# Altium PCB PCB.PcbDoc
Units mil, origin at the board's own origin, x right, y up, seen from the top; angles counter-clockwise.
Board outline 3410 x 3580 mil, 2 copper layers (Top Layer, Bottom Layer); 56 components, 51 nets, 246 pads, 33 vias.
Unrouted connection lines stored in the file: 2.
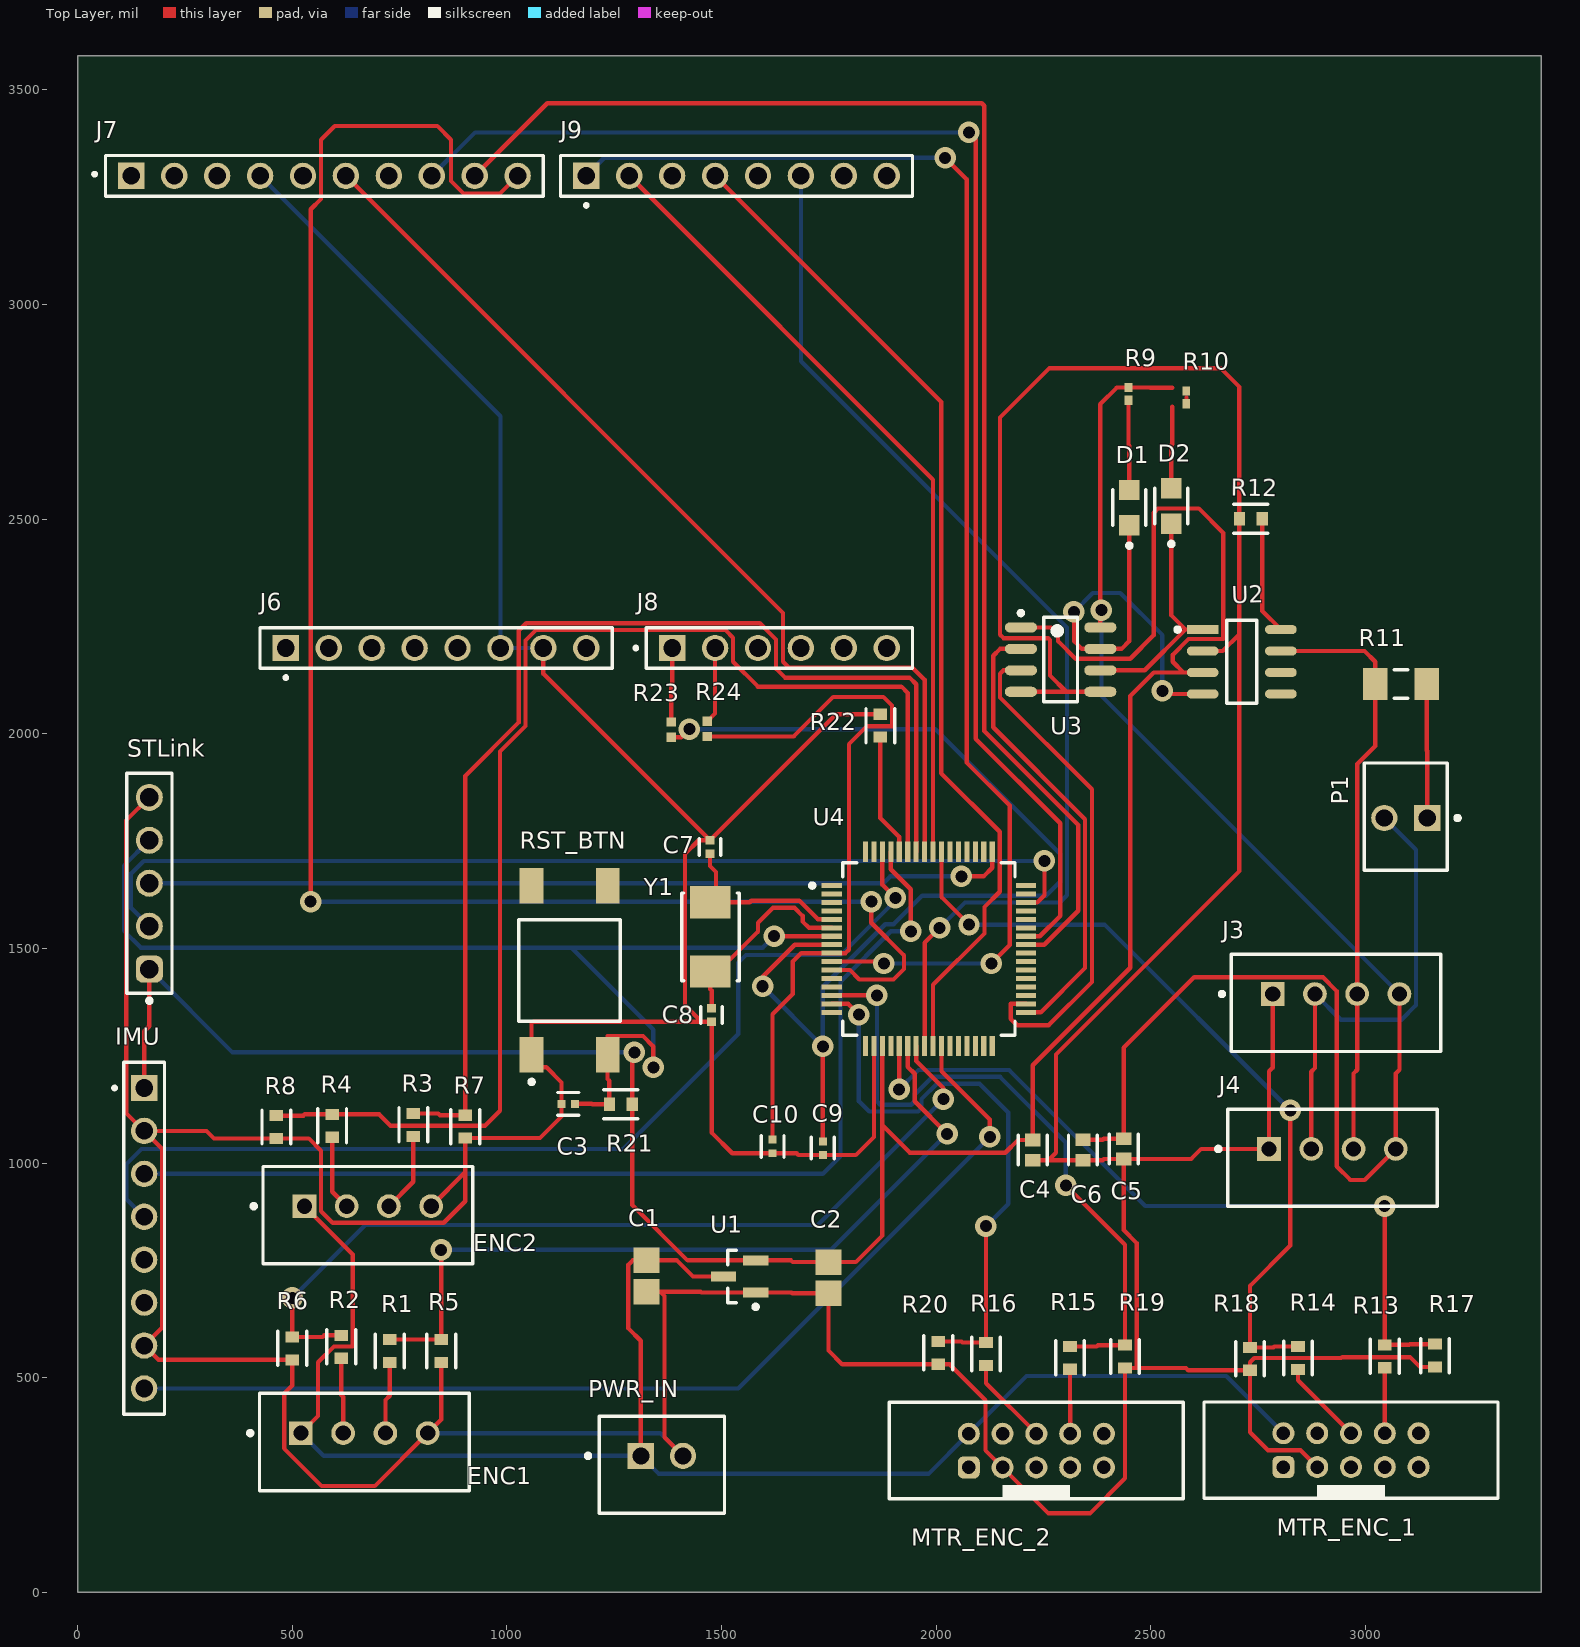
[diagram p0: Top Layer view]
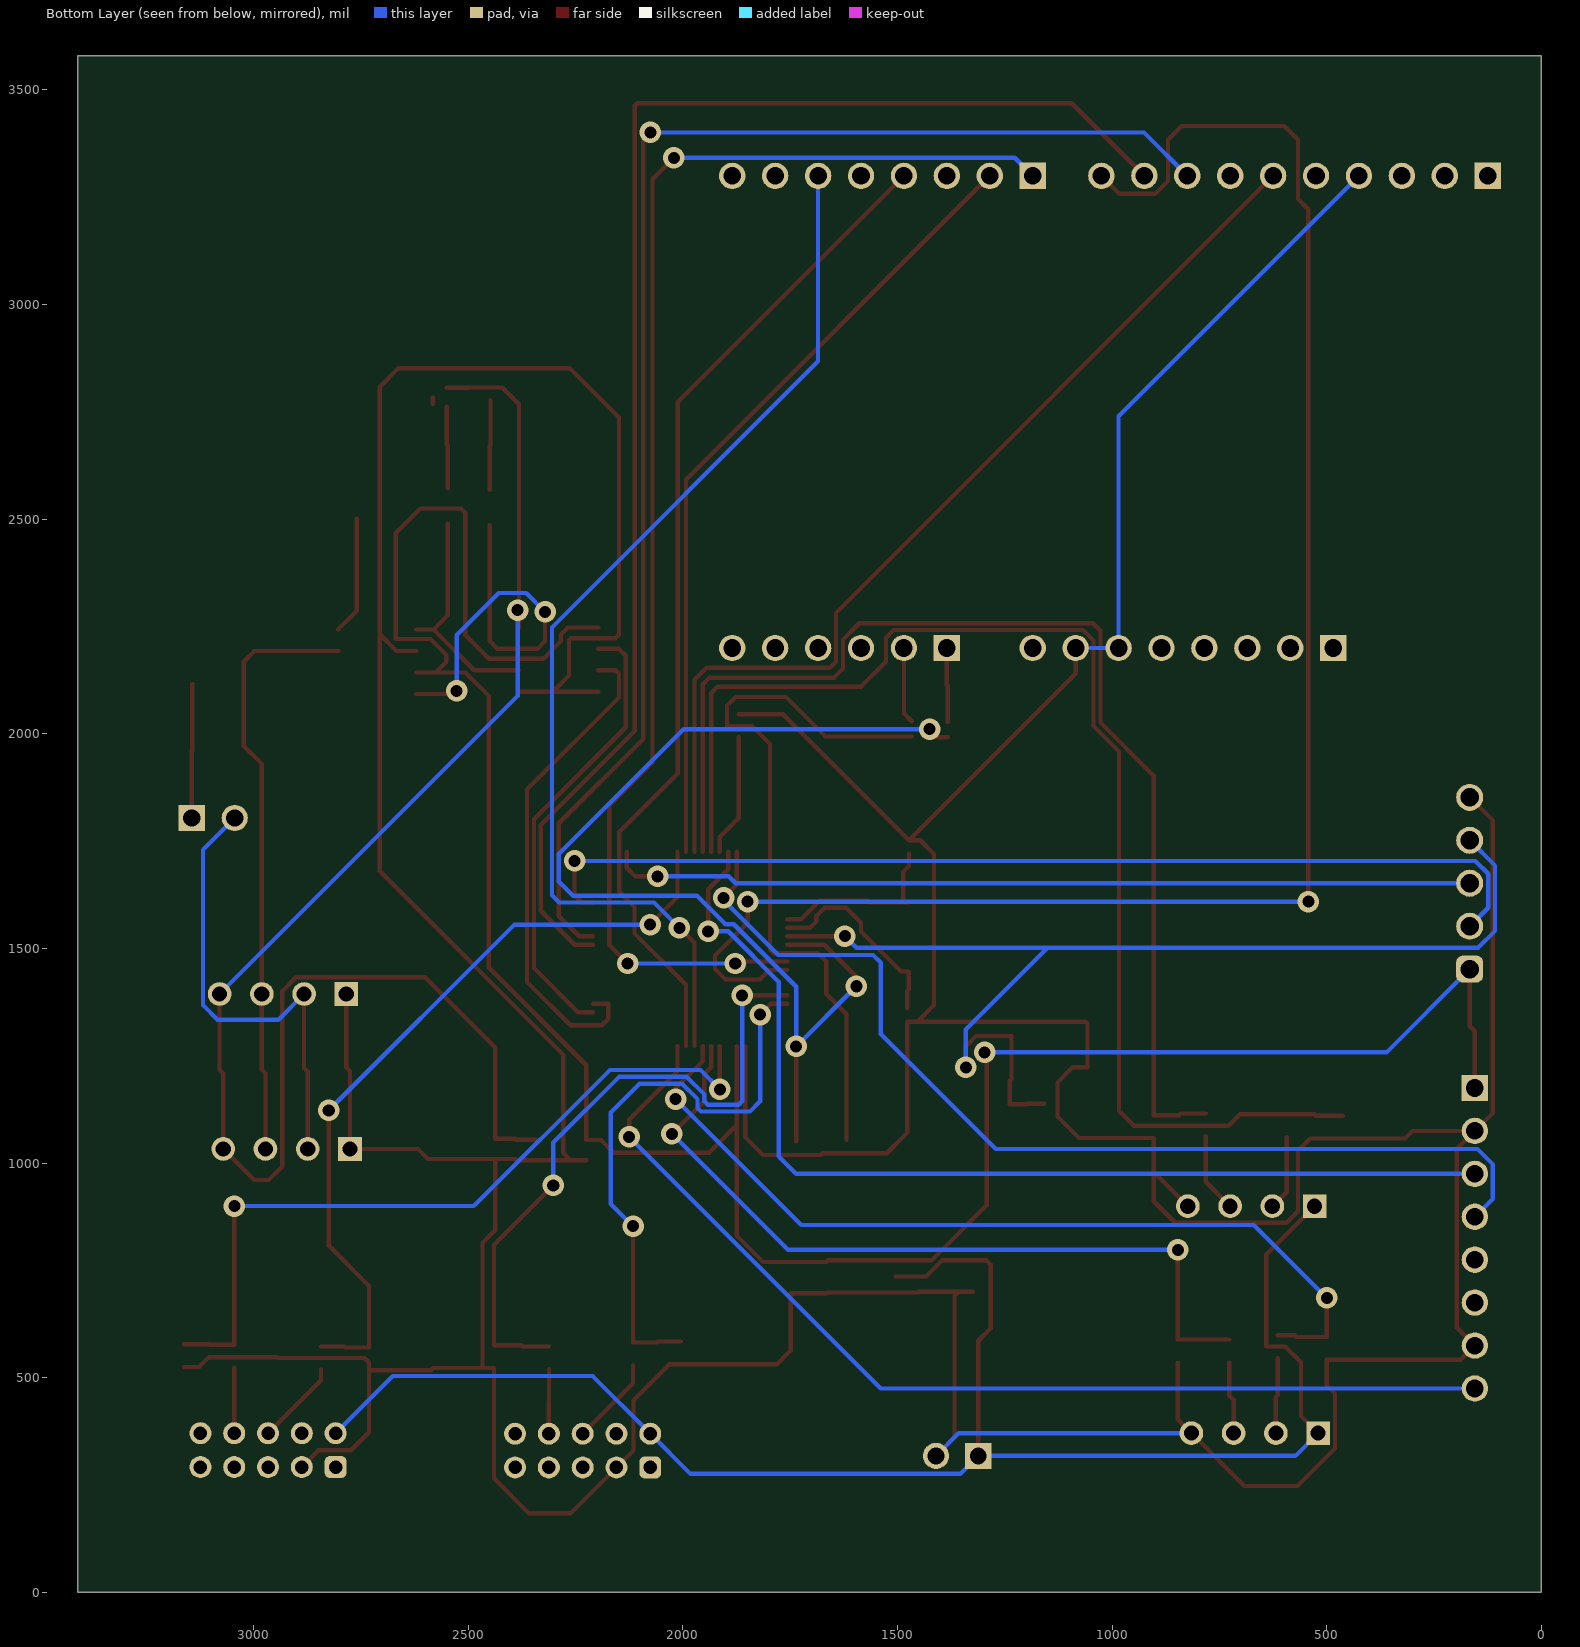
[diagram p1: Bottom Layer view, seen from below]
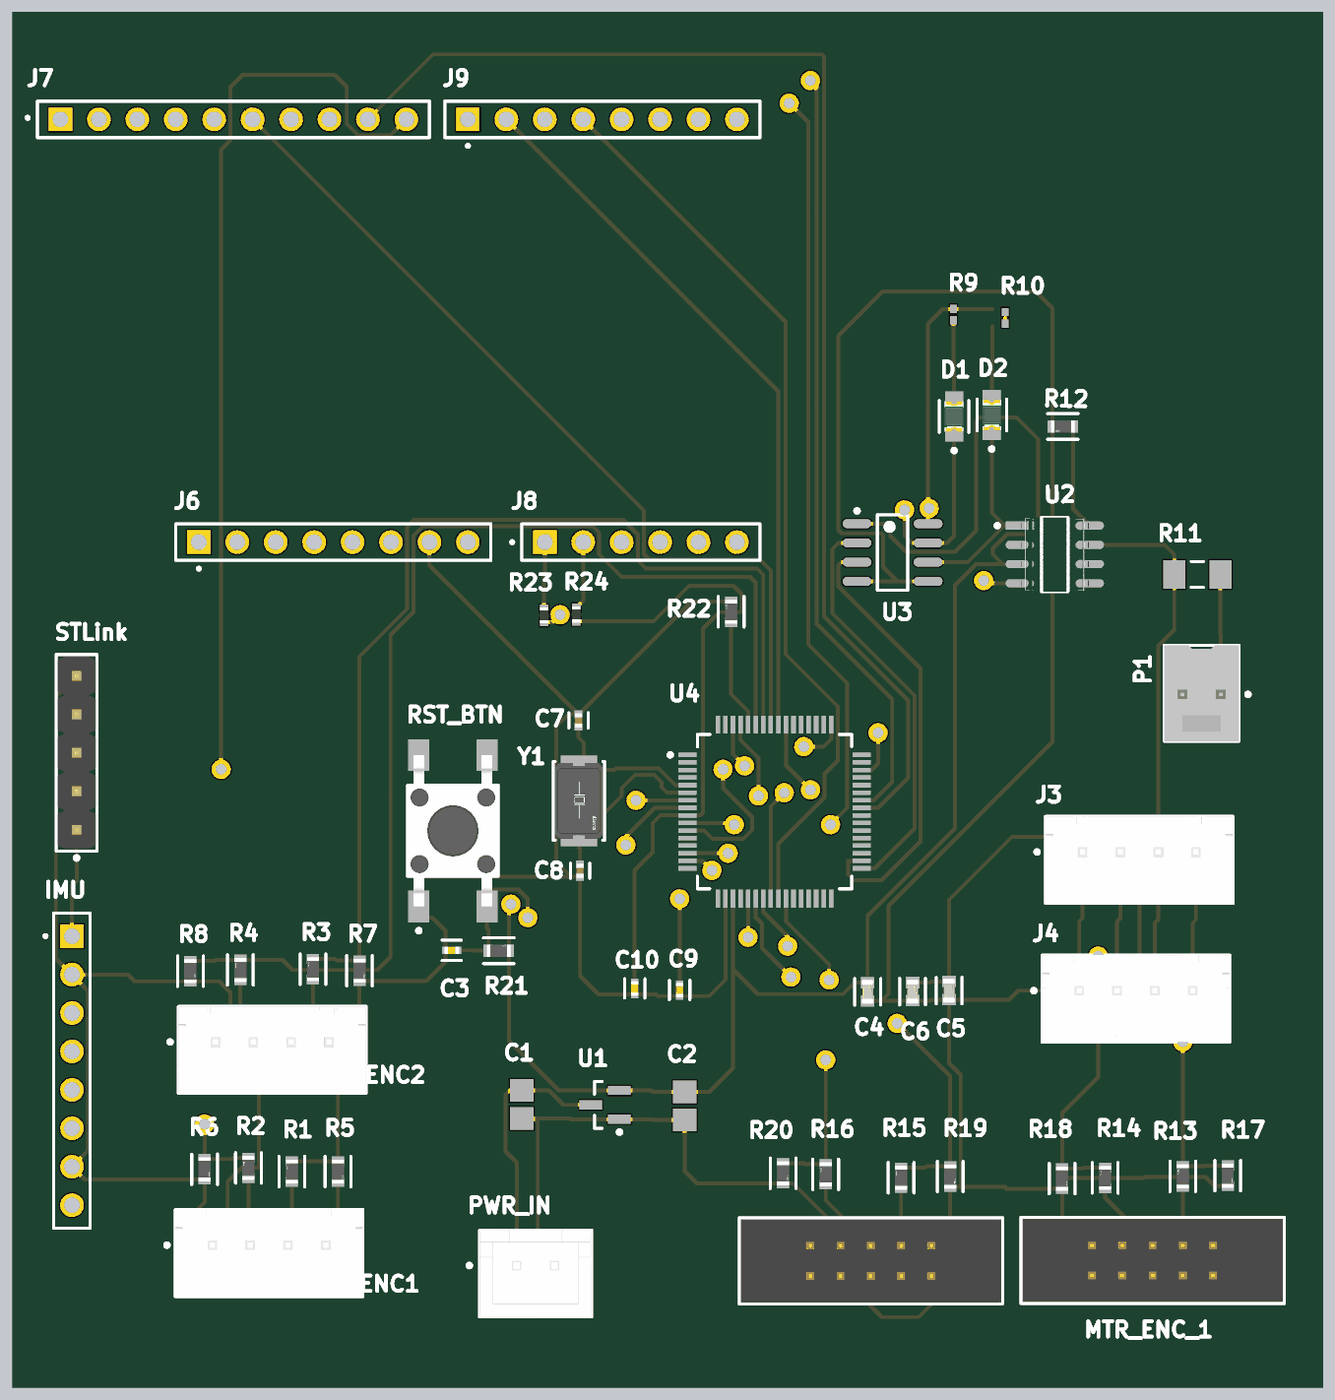
[diagram p2: 3D render of the assembled board from above, using the file's embedded part models]

## Layer stack, top to bottom
Top Solder: solder mask 0.4, Solder Resist, Dk 3.5
Top Layer: signal copper 1.4
Dielectric 1: dielectric 12.6, FR-4, Dk 4.8
Bottom Layer: signal copper 1.4
Bottom Solder: solder mask 0.4, Solder Resist, Dk 3.5

## Board outline
0,0 3410,0 3410,3580 0,3580

## Design rules (kind name [scope] priority, off if disabled: settings)
Clearance [All] p1: gap=6 ignorepadtopadclearanceinfootprint=FALSE
PolygonConnect [All] p1: connectstyle=Relief reliefconductorwidth=10 reliefentries=4 polygonreliefangle="90 Angle" airgapwidth=10
RoutingVias [All] p1: holewidth=28 width=50 viastyle="Through Hole" minholewidth=28 minwidth=50 maxholewidth=28 maxwidth=50
SolderMaskExpansion [All] p1: expansion=4 istentingtop=FALSE
SupplyNets "Schematic Supply Nets_7" [InNet('OSC2')] p1: voltage=0.000
SupplyNets "Schematic Supply Nets_6" [InNet('GND')] p2: voltage=0.000
SupplyNets "Schematic Supply Nets_5" [InNet('CAN_TX')] p3: voltage=0.000
SupplyNets "Schematic Supply Nets_4" [InNet('VCC-5V')] p4: voltage=0.000
SupplyNets "Schematic Supply Nets_3" [InNet('OSC1')] p5: voltage=0.000
SupplyNets "Schematic Supply Nets_2" [InNet('CAN-3V3')] p6: voltage=0.000
SupplyNets "Schematic Supply Nets_1" [InNet('VCC-3V3')] p7: voltage=0.000
SupplyNets "Schematic Supply Nets" [InNet('CAN_RX')] p8: voltage=0.000
Width [All] p1: maxlimit=10 minlimit=10 preferedwidth=10
30 further rules are at their usual default settings.

## Classes and differential pairs
component class VoltageRegulator_3v3: C1 C2 U1
component class STM32: C3 R21 R22 RST_BTN U4
component class STLink: STLink
component class Power: PWR_IN
component class Oscilator: C7 C8 Y1
component class OdomEncoders: ENC1 ENC2 R1 R2 R3 R4 R5 R6 R7 R8
component class MotorShield: C9 C10 J6 J7 J8 J9 R23 R24
component class MotorEncoders: MTR_ENC_1 MTR_ENC_2 R13 R14 R15 R16 R17 R18 R19 R20
component class IMU: IMU
component class Communication: C4 C5 C6 D1 D2 J3 J4 P1 R9 R10 R11 R12 U2 U3

## Components (designator, comment, footprint, x,y, rotation, side; value= is the part's Value field where it differs from the comment)
C1 "VJ0805Y105KXJTW1BC" CAPC2013X145X48ML20T23 1325,737 r90 top
C2 "VJ0805Y105KXJTW1BC" CAPC2013X145X48ML20T23 1749,733 r90 top
C3 "100nF" FP-0402B104K160CT-IPC_C 1143,1138 r180 top
C4 "C0603C104K8RACTU" FP-C0603C-CF-MFG 2225,1030.38 r270 top value="0.10 μF"
C5 "C0603C104K8RACTU" FP-C0603C-CF-MFG 2437,1033.24 r270 top value="0.10 μF"
C6 "C0603C104K8RACTU" FP-C0603C-CF-MFG 2342,1030.62 r270 top value="0.10 μF"
C7 "C0402C220J4GACAUTO" FP-C0402-BB-MFG 1473,1736.25 r90 top value="22 pF"
C8 "C0402C220J4GACAUTO" FP-C0402-BB-MFG 1477,1345.25 r270 top value="22 pF"
C9 "100nF" FP-0402B104K160CT-IPC_C 1736,1034.87 r90 top
C10 "100nF" FP-0402B104K160CT-IPC_C 1619,1038.87 r270 top
D1 "APHCM2012CGCK-F01" FP-APHCM2012CGCK-F01-MFG 2450,2527 r90 top
D2 "APHCM2012CGCK-F01" FP-APHCM2012CGCK-F01-MFG 2548,2531 r90 top
ENC1 "B4B-XH-A(LF)(SN)" FP-B4B-XH-A_LF_SN-MFG 667.79,350.33 r180 top
ENC2 "B4B-XH-A(LF)(SN)" FP-B4B-XH-A_LF_SN-MFG 676,879 r180 top
IMU "SSW-108-XX-X-S" SAMTEC_SSW-108-XX-X-S 155,1175 r270 top
J3 "B4B-XH-A(LF)(SN)" FP-B4B-XH-A_LF_SN-MFG 2931.64,1373.33 r180 top
J4 "B4B-XH-A(LF)(SN)" FP-B4B-XH-A_LF_SN-MFG 2923.21,1012.33 r180 top
J6 "SSW-108-XX-X-S" SAMTEC_SSW-108-XX-X-S 485,2200 r0 top locked
J7 "SSW-110-01-XXX-S" SAMTEC_SSW-110-01-XXX-S 125,3300 r0 top
J8 "SSW-106-01-X-S" SAMTEC_SSW-106-01-X-S 1385,2200 r0 top locked
J9 "SSW-108-XX-X-S" SAMTEC_SSW-108-XX-X-S 1185,3300 r0 top
MTR_ENC_1 "62501021621" 62501021621 2966.48,331.37 r0 top
MTR_ENC_2 "62501021621" 62501021621 2233.48,330.37 r0 top
P1 "22-23-2021" MOLX-22-23-2021_V 3094,1804 r180 top
PWR_IN "B2B-XH-A(LF)(SN)" FP-B2B-XH-A_LF_SN-MFG 1361.21,297.33 r0 top
R1 "10K" FP-RC0603-0_55-IPC_C 727,562.36 r90 top
R2 "10K" FP-RC0603-0_55-IPC_C 614,572 r90 top
R3 "10K" FP-RC0603-0_55-IPC_C 782,1089 r90 top
R4 "10K" FP-RC0603-0_55-IPC_C 593,1087 r90 top
R5 "20K" FP-RC0603-0_55-IPC_C 847,562.36 r270 top
R6 "20K" FP-RC0603-0_55-IPC_C 500,568.36 r270 top
R7 "20K" FP-RC0603-0_55-IPC_C 903,1085 r270 top
R8 "20K" FP-RC0603-0_55-IPC_C 463,1084 r270 top
R9 "CRCW02011K00JNED" RESC0603X28X15ML05T05 2448,2792 r90 top
R10 "CRCW02011K00JNED" RESC0603X28X15ML05T05 2583,2783.76 r90 top
R11 "RG3216P-1200-B-T5" RESC3216X50X50ML20T20 3082.96,2116 r0 top
R12 "10K" FP-RC0603-0_55-IPC_C 2733,2501 r180 top
R13 "10K" FP-RC0603-0_55-IPC_C 3045,550 r90 top
R14 "10K" FP-RC0603-0_55-IPC_C 2843,546 r90 top
R15 "10K" FP-RC0603-0_55-IPC_C 2312,546.36 r90 top
R16 "10K" FP-RC0603-0_55-IPC_C 2116,555.36 r90 top
R17 "20K" FP-RC0603-0_55-IPC_C 3162,551.64 r270 top
R18 "20K" FP-RC0603-0_55-IPC_C 2731,544 r270 top
R19 "20K" FP-RC0603-0_55-IPC_C 2440,549.36 r270 top
R20 "20K" FP-RC0603-0_55-IPC_C 2005,558 r270 top
R21 "10k" FP-RC0603-0_55-IPC_C 1265.36,1137 r0 top
R22 "10k" FP-RC0603-0_55-IPC_C 1870,2019 r90 top
R23 "1k" RESC1005X40X25NL05T05 1383,2009.72 r90 top
R24 "1k" RESC1005X40X25NL05T05 1467,2011.72 r90 top
RST_BTN "1301.9316.24" FP-1301_9316_24-MFG 1146,1449 r90 top
STLink "61300511121" 61300511121 167,1652 r90 top
U1 "MCP1700T-3302E/TT" SOT-23-TT3_N 1542,736 r180 top
U2 "SN65HVD230QDR" FP-D0008A-IPC_C 2712,2168 r0 top
U3 "ADUM1201BRZ-RL7" ADI-R-8_L 2290,2173 r0 top
U4 "STM32F446RET6" FP-LQFP64-5W-MFG 1983,1499 r0 top
Y1 "ABM3-8.000MHZ-D2Y-T" FP-ABM3-MFG 1474,1527 r270 top

## Footprints (in the part's own frame and the unit in brackets; to place one, negate y for a bottom-side part, rotate by r counter-clockwise, add the part's x,y. Pads: shape width x height; smd on the part's side, far side on the other; paste and mask are expansions set on the pad)
61300511121 [mm] "Pin Header, pitch 2.54 mm, THT, Vertical, single row, 5p"
  rrect50% 1.6x1.6 hole 1.1: 1(-5.08,0)
  round 1.6 hole 1.1: 2(-2.54,0) 3(0,0) 4(2.54,0) 5(5.08,0)
  silkscreen extent -7.07,-1.34 6.5,1.34, body extent -6.35,-1.27 6.35,1.27, height 8.57
62501021621 [mm] "2.00mm Male Box Header, 10p"
  rrect50% 1.3x1.3 hole 0.8: 1(-4,-1)
  round 1.3 hole 0.8: 2(-4,1) 3(-2,-1) 4(-2,1) 5(0,-1) 6(0,1) 7(2,-1) 8(2,1) 9(4,-1) 10(4,1)
  silkscreen extent -8.7,-2.85 8.7,2.85, body extent -8.6,-2.75 8.6,2.75, height 5.65
ADI-R-8_L [mm] "SOIC, 8-Leads, Body 4.9x3.9mm, Pitch 1.27mm, IPC High Density"
  oval 1.9x0.6 smd: 1(-2.35,1.905) 2(-2.35,0.635) 3(-2.35,-0.635) 4(-2.35,-1.905) 5(2.35,-1.905) 6(2.35,-0.635) 7(2.35,0.635) 8(2.35,1.905)
  silkscreen extent -2.47,-2.5 1,2.88, body extent -2,-2.5 2,2.5, height 1.75
CAPC2013X145X48ML20T23 [mm] "Chip Capacitor, 2-Leads, Body 2.00x1.25mm, IPC Low Density"
  rect 1.5x1.55 smd: 1(-0.925,0) 2(0.925,0)
  body extent -1.1,-0.72 1.1,0.72, height 1.45
FP-0402B104K160CT-IPC_C [mil]
  rect 18.36x18.6 smd paste+0 mask+0: 1(-15.87,0) 2(15.87,0)
  silkscreen extent -25,-27 25,27, body extent -29,-15 29,15, height 10
FP-1301_9316_24-MFG [mm]
  rect 2.1x1.4 smd paste+0 mask+0: 1(-5,2.25) 2(5,2.25) 3(-5,-2.25) 4(5,-2.25)
  silkscreen extent -6.72,-3 3,3, body extent -6.15,-3.1 6.15,3.1, height 0.25
FP-ABM3-MFG [mm]
  rect 1.9x2.4 smd paste+0 mask+0: 1(-2.05,0) 2(2.05,0)
  silkscreen extent -2.6,-1.7 2.6,1.7, body extent -3.1,-1.8 3.1,1.8, height 0.25
FP-APHCM2012CGCK-F01-MFG [mm]
  rect 1.2x1.2 smd paste+0 mask+0: 1(-1.05,0) 2(1.05,0)
  silkscreen extent -2.37,-0.98 1.05,0.98, body extent -1.75,-0.77 1.75,0.77, height 0.25
FP-B2B-XH-A_LF_SN-MFG [mm]
  rect 1.55x1.55 hole 1 paste-2539.97 mask+0: 1(-1.25,0.525)
  round 1.55 hole 1 paste-2539.97 mask+0: 2(1.25,0.525)
  silkscreen extent -4.5,-2.87 3.7,2.88, body extent -3.8,-2.98 3.8,2.98, height 0.25
FP-B4B-XH-A_LF_SN-MFG [mm]
  rect 1.4x1.4 hole 0.9 paste-2539.97 mask+0: 1(3.75,-0.525)
  round 1.4 hole 0.9 paste-2539.97 mask+0: 2(1.25,-0.525) 3(-1.25,-0.525) 4(-3.75,-0.525)
  silkscreen extent -6.2,-2.88 6.87,2.87, body extent -6.3,-2.98 6.3,2.98, height 0.25
FP-C0402-BB-MFG [mm]
  rect 0.52x0.52 smd paste+0 mask+0: 1(-0.4,0) 2(0.4,0)
  silkscreen extent -0.5,-0.64 0.5,0.64, body extent -0.8,-0.4 0.8,0.4, height 0.25
FP-C0603C-CF-MFG [mm]
  rect 0.75x0.9 smd paste+0 mask+0: 1(-0.6,0) 2(0.6,0)
  silkscreen extent -0.87,-0.85 0.88,0.85, body extent -1.2,-0.6 1.2,0.6, height 0.25
FP-D0008A-IPC_C [mil]
  rect 73.59x21.34 smd paste+0 mask+0: 1(-91.09,75)
  rrect100% 73.59x21.34 smd paste+0 mask+0: 2(-91.09,25) 3(-91.09,-25) 4(-91.09,-75) 5(91.09,-75) 6(91.09,-25) 7(91.09,25) 8(91.09,75)
  silkscreen extent -154,-97 35,97, body extent -132,-100 132,100, height 10
FP-LQFP64-5W-MFG [mm]
  rect 1.2x0.3 smd paste+0 mask+0: 1(-5.75,3.75) 2(-5.75,3.25) 3(-5.75,2.75) 4(-5.75,2.25) 5(-5.75,1.75) 6(-5.75,1.25) 7(-5.75,0.75) 8(-5.75,0.25) 9(-5.75,-0.25) 10(-5.75,-0.75) 11(-5.75,-1.25) 12(-5.75,-1.75) 13(-5.75,-2.25) 14(-5.75,-2.75) 15(-5.75,-3.25) 16(-5.75,-3.75) 33(5.75,-3.75) 34(5.75,-3.25) 35(5.75,-2.75) 36(5.75,-2.25) 37(5.75,-1.75) 38(5.75,-1.25) 39(5.75,-0.75) 40(5.75,-0.25) 41(5.75,0.25) 42(5.75,0.75) 43(5.75,1.25) 44(5.75,1.75) 45(5.75,2.25) 46(5.75,2.75) 47(5.75,3.25) 48(5.75,3.75)
  rect 0.3x1.2 smd paste+0 mask+0: 17(-3.75,-5.75) 18(-3.25,-5.75) 19(-2.75,-5.75) 20(-2.25,-5.75) 21(-1.75,-5.75) 22(-1.25,-5.75) 23(-0.75,-5.75) 24(-0.25,-5.75) 25(0.25,-5.75) 26(0.75,-5.75) 27(1.25,-5.75) 28(1.75,-5.75) 29(2.25,-5.75) 30(2.75,-5.75) 31(3.25,-5.75) 32(3.75,-5.75) 49(3.75,5.75) 50(3.25,5.75) 51(2.75,5.75) 52(2.25,5.75) 53(1.75,5.75) 54(1.25,5.75) 55(0.75,5.75) 56(0.25,5.75) 57(-0.25,5.75) 58(-0.75,5.75) 59(-1.25,5.75) 60(-1.75,5.75) 61(-2.25,5.75) 62(-2.75,5.75) 63(-3.25,5.75) 64(-3.75,5.75)
  silkscreen extent -7.02,-5.1 5.1,5.1
FP-RC0603-0_55-IPC_C [mil]
  rect 25.93x31.97 smd paste+0 mask+0: 1(-26.64,0) 2(26.64,0)
  silkscreen extent -40,-33 40,33, body extent -44,-22 44,22, height 10
MOLX-22-23-2021_V [mm] "THD, 2-Leads, Body 6.35x4.93mm, Pitch 2.54mm"
  rect 1.55x1.55 hole 1.02: 1(-1.27,0)
  round 1.55 hole 1.02: 2(1.27,0)
  silkscreen extent -3.19,-3.25 2.47,3.1, body extent -2.46,-3.25 2.46,3.1, height 10.66
RESC0603X28X15ML05T05 [mm] "Chip Resistor, 2-Leads, Body 0.60x0.30mm, IPC Low Density"
  rect 0.55x0.45 smd: 1(-0.375,0) 2(0.375,0)
  body extent -0.33,-0.17 0.33,0.18, height 0.28
RESC1005X40X25NL05T05 [mm] "Chip Resistor, 2-Leads, Body 1.05x0.55mm, IPC Medium Density"
  rect 0.55x0.55 smd: 1(-0.45,0) 2(0.45,0)
  body extent -0.53,-0.28 0.53,0.28, height 0.4
RESC3216X50X50ML20T20 [mm] "Chip Resistor, 2-Leads, Body 3.20x1.60mm, IPC Low Density"
  rect 1.45x1.9 smd: 1(-1.525,0) 2(1.525,0)
  silkscreen extent -0.4,-0.85 0.4,0.85, body extent -1.7,-0.9 1.7,0.9, height 0.5
SAMTEC_SSW-106-01-X-S [mm]
  rect 1.56x1.56 / inner round 1.56 / far side rect 1.56x1.56 hole 1.04: 01(0,0)
  round 1.56 hole 1.04: 02(2.54,0) 03(5.08,0) 04(7.62,0) 05(10.16,0) 06(12.7,0)
  silkscreen extent -2.25,-1.2 14.23,1.2
SAMTEC_SSW-108-XX-X-S [mm]
  rect 1.56x1.56 / inner round 1.56 / far side rect 1.56x1.56 hole 1.04: 01(0,0)
  round 1.56 hole 1.04: 02(2.54,0) 03(5.08,0) 04(7.62,0) 05(10.16,0) 06(12.7,0) 07(15.24,0) 08(17.78,0)
  silkscreen extent -1.53,-1.85 19.31,1.2
SAMTEC_SSW-110-01-XXX-S [mm]
  rect 1.56x1.56 / inner round 1.56 / far side rect 1.56x1.56 hole 1.04: 01(0,0)
  round 1.56 hole 1.04: 02(2.54,0) 03(5.08,0) 04(7.62,0) 05(10.16,0) 06(12.7,0) 07(15.24,0) 08(17.78,0) 09(20.32,0) 10(22.86,0)
  silkscreen extent -2.27,-1.2 24.39,1.2
SOT-23-TT3_N [mm] "SOT23, 3-Leads, Body 2.9x1.3mm, Pitch 0.95mm, Lead Span 2.4mm, IPC Medium Density"
  rect 1.5x0.6 smd: 1(-0.95,0.95) 2(-0.95,-0.95) 3(0.95,0)
  silkscreen extent -1.07,-1.55 0.7,1.92, body extent -0.7,-1.52 0.7,1.53, height 1.12

## Part data
C1 C2: library part CMP-2007-03175-1, Manufacturer=Vitramon, Part Number=VJ0805Y105KXJTW1BC
C3 C9 C10: library part CMP-45632-000002-1, "CAP CER 0.1UF 16V X7R 0402", Case Code (Imperial)=0402, Case Code (Metric)=1005, Dielectric=X7R, Max Operating Temperature=125°C, Min Operating Temperature=-55°C, Tolerance=10%, Voltage Rating=16V, Capacitance=100nF, Case/Package=0402, Depth=0.5mm, Lead Free="Lead Free", Length=1mm, Packaging="Tape and Reel", Radiation Hardening=No, RoHS Compliant=Yes, Series=-, Voltage Rating (DC)=16V
C4 C5 C6: library part CMP-1035-02580-3, "CAP CER 0.1UF 10V X7R 0603", Capacitance="0.10 μF", Manufacturer=KEMET, Package=C0603C-CF, Temperature="-55°C to +125°C", Temperature Characteristic=X7R, Temperature Coefficient=30ppm/°C, Temperature Range High=+125°C, Temperature Range Low=-55°C, Tolerance=0.1, Voltage Rating="10 V", Automotive=Yes, Automotive Grade="Grade 1", Category=Cap, ComponentLink2Description=Datasheet, ComponentLink2URL=https://api.kemet.com/component-edge/download/datasheet/C0603C100J5GACAUTO.pdf, Device Class L1="Passive Components", Device Class L2=Capacitors, Device Class L3="Ceramic Capacitors", Digikey Description="CAP CER 0.1UF 10V X7R 0603", Height=0.87mm, Lead Free=Yes, Manufacturer Part Number=C0603C104K8RACTU, Material=Ceramic, Mouser Description="Multilayer Ceramic Capacitors MLCC - SMD/SMT 10volts 0.1uF X7R 10%", Octopart=https://octopart.com/c0603c104k8ractu-kemet-145075, RoHS=TRUE
C7 C8: library part CMP-03020-002269-1, "C0402 22 pF C0G 5.00% 16 V", Capacitance="22 pF", Manufacturer=Kemet, Package=C0402-BB, Temperature="-55°C to +125°C", Temperature Characteristic=C0G, Temperature Coefficient=15%, Temperature Range High=+125°C, Temperature Range Low=-55°C, Tolerance=0.05, Voltage Rating="16 V", Automotive=No, Category=Cap, ComponentLink2Description=Datasheet, ComponentLink2URL=https://content.kemet.com/datasheets/KEM_C1002_X7R_SMD.pdf, Device Class L1="Passive Components", Device Class L2=Capacitors, Device Class L3="Ceramic Capacitors", Height=0.55mm, Ipc Land Pattern Name=CAPC10050X50, Lead Free=Yes, Manufacturer Part Number=C0402C220J4GACAUTO, Material=Ceramic, Octopart=https://octopart.com/c0402c220j4gacauto-kemet-95437018, RoHS=TRUE
D1 D2: library part CMP-44529-000062-1, "LED GREEN CLEAR CHIP SMD", Case Code (Imperial)=0805, Case Code (Metric)=2012, Color=Green, Forward Current=20mA, Forward Voltage=2.1V, Lens Color=Clear, Max Operating Temperature=85°C, Min Operating Temperature=-40°C, Package Quantity=1, Case/Package=0805, Dominant Wavelength=570nm, Height=0.4mm, Illumination Color=Green, Lead Free="Lead Free", Length=2mm, Lens Style=Clear, Luminous Intensity=40mcd, Mount="Surface Mount", Number of LEDs=1, Number of Pins=2, Packaging="Tape and Reel", RoHS Compliant=Yes, Series=APHCM, Test Current=20mA, Viewing Angle=110°, Wavelength=570nm, Width=1.25mm
ENC1 ENC2 J3 J4: library part CMP-17439-000250-1, "CONN HEADER VERT 4POS 2.5MM", Color=Natural, Contact Resistance=20mR, Current Rating=3A, Flammability Rating="UL94 V-0", Housing Color=White, Insulation Resistance=1GR, Max Operating Temperature=85°C, Max Voltage Rating (AC)=250V, Min Operating Temperature=-25°C, Package Quantity=500, Connector Type=Header, Contact Finish - Mating=TIN, Contact Material=Brass, Contact Plating=Tin, Contact Shape=Square, Contact Type="Male Pin", Depth=5.75mm, Fastening Type=Detent, Gender=Male, Housing Material=Polyamide, Insulation Color=Natural, Insulation Material=Nylon, Lead Free="Lead Free", Lead Pitch=2.5mm, Length=12.4mm, Mated Stacking Heights=9.8mm, Material=Polyamide, Max Current Rating=3A, Max Voltage Rating (DC)=250V, Mount="Through Hole", Number of Contacts=4, Number of Positions=4, Number of Rows=1, Orientation=Straight, Packaging=Bulk, Pitch=2.5mm, REACH SVHC="No SVHC", Series=XH, Termination=Solder, Voltage Rating=250V, Voltage Rating (AC)=250V, Wire/Cable Gauge=22AWG
IMU J6 J9: "8 Position Receptacle Connector 0.100 (2.54mm) Through Hole, Right Angle Gold", Package=None, Check_prices=https://www.snapeda.com/parts/SSW-108-23-G-S/Samtec/view-part/?ref=eda, MF=Samtec, MP=SSW-108-23-G-S, SnapEDA_Link=https://www.snapeda.com/parts/SSW-108-23-G-S/Samtec/view-part/?ref=snap
J7: "SSW - Samtec 2.54mm Single Row Straight Socket Strip 8.5 Profile - Fast Stock", Package=None, Check_prices=https://www.snapeda.com/parts/SSW-110-01-F-S/Samtec+Inc./view-part/?ref=eda, MF=Samtec, MP=SSW-110-01-F-S, SnapEDA_Link=https://www.snapeda.com/parts/SSW-110-01-F-S/Samtec+Inc./view-part/?ref=snap
J8: Package=None, Availability=Unavailable, MF="Samtec Inc.", MP=SSW-106-01-X-S, Price=None
MTR_ENC_1 MTR_ENC_2: library part CMP-1502-00108-3, "Conn, Header, 10Pos, 2Row, 2Mm Rohs Compliant: Yes", Current Rating=2A, Insulation Resistance=1GΩ, Max Operating Temperature=125°C, Min Operating Temperature=-40°C, Contact Plating=Gold, Gender=Male, Insulation Material=PBT, Length=17.2mm, Number of Pins=10, Pitch=2mm
P1: library part CMP-1704-00001-3, "Male Header, Pitch 2.54 mm, 1 x 2 Position, Height 10.67 mm, Tail Length 3.56 mm, 0 to 75 degC, RoHS, Bulk", Max Operating Temperature="75 degC", Min Operating Temperature="0 degC", Package Quantity=3000, ComponentLink1Description="Manufacturer URL", ComponentLink1URL=http://www.molex.com/, ComponentLink2Description=Datasheet, ComponentLink2URL=https://datasheet.ciiva.com/19454/232266-19454304.pdf, Height="10.67 mm", Length="5.08 mm", Mount="Through Hole", Mounting Technology="Through Hole", PackageDescription="Male Header, Pitch 2.54 mm, 1 x 2 Position, Height 10.67 mm, Tail Length 3.56 mm", Packaging=Bulk, PartNumber=22-23-2021, Pins=2, Radiation Hardening=No, REACH SVHC=Unknown, RoHSCompliant=True, Width="6.35 mm"
PWR_IN: library part CMP-2000-05888-3, "CONN HEADER VERT 2POS 2.5MM", Color=Natural, Contact Resistance=20mR, Current Rating=3A, Housing Color=White, Insulation Resistance=1GR, Max Operating Temperature=85°C, Max Voltage Rating (AC)=250V, Min Operating Temperature=-25°C, Connector Type="Male Pin", Contact Material=Brass, Contact Plating=Tin, Contact Type="Male Pin", Depth=5.75mm, Fastening Type=Detent, Housing Material=Polyamide, Lead Free="Lead Free", Lead Pitch=2.5mm, Length=7.4mm, Max Current Rating=3A, Max Voltage Rating (DC)=250V, Mount="Through Hole", Number of Contacts=2, Number of Positions=2, Number of Rows=1, Orientation=Straight, Packaging=Bulk, Pitch=2.5mm, REACH SVHC="No SVHC", Series=XH, Termination=Solder, Voltage Rating=250V, Voltage Rating (AC)=250V, Wire/Cable Gauge=22AWG
R1 R2 R3 R4 R12 R13 R14 R15 R16 R21 R22: library part CMP-2100-03664-2, "RES 10K OHM 1% 1/10W 0603", Case Code (Imperial)=0603, Case Code (Metric)=1608, Max Operating Temperature=155°C, Max Power Dissipation=100mW, Min Operating Temperature=-55°C, Resistance=10kR, Resistance Tolerance=1%, Resistor Type="Thick Film", Temperature Coefficient=100ppm/°C, Voltage Rating=75V, Voltage Rating (DC)=50V, Case/Package=0603, Construction=Rectangular, Depth=0.8mm, Features="Moisture Resistant", Height=0.45mm, Lead Free="Lead Free", Lead Pitch=0.3mm, Length=1.6mm, Military Standard=Not, Number of Pins=2, Number of Terminations=2, Packaging="Tape and Reel", Power Rating=100mW, RoHS Compliant=Yes, Series=RC, Size Code=0603, Termination=SMD/SMT, Tolerance=1%, Weight=7.1E-05oz, Width=0.8mm
R5 R6 R7 R8 R17 R18 R19 R20: library part CMP-2000-06932-2, "RES 20K OHM 1% 1/10W 0603", Case Code (Imperial)=0603, Case Code (Metric)=1608, Max Operating Temperature=155°C, Max Power Dissipation=100mW, Min Operating Temperature=-55°C, Package Quantity=1, Resistance=20kR, Resistance Tolerance=1%, Resistor Type="Thick Film", Temperature Coefficient=100ppm/°C, Voltage Rating=50V, Case/Package=0603, Construction=Rectangular, Depth=0.8mm, Features="Moisture Resistant", Height=0.022inch, Lead Free="Lead Free", Length=0.063inch, Military Standard=Not, Number of Pins=2, Number of Terminations=2, Packaging="Tape and Reel", Power Rating=100mW, REACH SVHC="No SVHC", RoHS Compliant=Yes, Series=RC, Size Code=0603, Technology="THICK FILM", Termination=SMD/SMT, Tolerance=1%, Voltage Rating (DC)=50V, Width=0.031inch
R9 R10: library part CMP-1010-00074-2, "1 KOhm", Manufacturer="Vishay Dale", Part Number=CRCW02011K00JNED
R11: library part CMP-2003-02786-1, Manufacturer=Susumu, Part Number=RG3216P-1200-B-T5
R23 R24: library part CMP-1011-00510-4, "Chip Resistor, 1 KOhm, +/- 1%, 100 mW, -55 to 155 degC, 0402 (1005 Metric), RoHS, Tape and Reel", Case Code (Imperial)=0402, Case Code (Metric)=1005, Manufacturer="Basic Passives", Max Operating Temperature="155 degC", Min Operating Temperature="-55 degC", Package Quantity=10000, PartNumber=ERJ-2RKF1001X, Power Rating="100 mW", Resistance="1 KOhm", Tolerance=1%, Voltage Rating="50 V", Case\/Package=0402, ComponentLink1Description="Manufacturer URL", ComponentLink1URL=http://www.panasonic.com/, ComponentLink2Description=Datasheet, ComponentLink2URL=http://industrial.panasonic.com/cdbs/www-data/pdf/RDA0000/AOA0000C86.pdf, DatasheetVersion=04/2015, Height="0.35 mm", Length="1 mm", Mount="Surface Mount", Mounting Technology="Surface Mount", PackageDescription="2-Pin Surface Mount Device, Body 1 x 0.5 mm", PackageReference=0402, Packaging="Tape and Reel", Pins=2, Radiation Hardening=No, REACH SVHC=Yes, RoHSCompliant=true, Width="0.5 mm"
RST_BTN: library part CMP-26321-000004-1, "LSH 6X6 SHORT TRAVEL SWITCH 7.00", Case/Package=SMD/SMT, Max Current Rating=50mA, Max Operating Temperature=70°C, Max Voltage Rating (DC)=12V, Min Operating Temperature=-20°C, Operating Force=1.6N, Depth=10mm, Length=6mm, Mechanical Life=100000Cycles, Mount="Surface Mount", Orientation=Straight, Packaging="Tape and Reel", Radiation Hardening=No, RoHS Compliant=Yes, Termination="Gull Wing", Throw Configuration=SPST, Voltage Rating (DC)=12V
STLink: library part CMP-1502-01068-4, "THT Vertical Pin Header WR-PHD, Pitch 2.54 mm, Single Row, 5 pins", Color=Black, Contact Resistance=20mΩ, Current Rating=3A, Max Operating Temperature=105°C, Min Operating Temperature=-40°C, Operating Supply Voltage=250V, Connector Type="Male Pin", Contact Material=Gold, Contact Mating Length=5.9944mm, Contact Plating=Gold, Gender=Male, Height=8.89mm, Lead Free="Lead Free", Lead Pitch=2.54mm, Mount="Through Hole", Number of Contacts=5, Number of Pins=5, Number of Positions=5, Number of Rows=1, Orientation=Vertical, Packaging=Bulk, Pitch=2.54mm, RoHS=Compliant, Termination=Solder, Voltage Rating=250V
U1: library part CMP-0136-00791-1, "Low Quiescent Current LDO, 3-Pin SOT-23, Extended Temperature, Tape and Reel", Code_IPC=SOT23-3, DatasheetVersion="revB, Feb-2007", PackageDescription="3-Lead Plastic Small Outline Transistor (TT) [SOT-23]", PackageReference=SOT-23-TT3, PackageVersion="revBB, Aug-2009"
U2: library part CMP-0315-00033-3, "IC TRANSCEIVER HALF 1/1 8SOIC", Case/Package=D, Max Operating Temperature=125°C, Max Supply Current=17mA, Max Supply Voltage=3.6V, Min Operating Temperature=-40°C, Min Supply Voltage=3V, Operating Supply Voltage=3.3V, Package Quantity=2500, Contact Plating=Gold, Data Rate=1Mbps, Lead Free="Lead Free", Nominal Supply Current=17mA, Number of Drivers=1, Number of Pins=8, Number of Receivers=1, Number of Transceivers=1, Packaging="Tape and Reel", Radiation Hardening=No, Receiver Hysteresis=100mV, RoHS Compliant=Yes, Simplex/Duplex="Half Duplex", Weight=0.002822oz
U3: library part CMP-0534-00027-1, "Dual Channel Digital Isolator, 2.5 KV rms Insulation Rating, 10 Mbps Data Rate, 50 ns Delay, Industrial, 8-pin SOIC (R-8), Reel", Insulation Rating (kVrms)=2.5, Manufacturer="Analog Devices", Max Operating Temp (degreesC)=125, Code_JEDEC=MS-012-AA, ComponentLink1Description="Manufacturer URL", ComponentLink1URL=http://www.analog.com/en/index.html, ComponentLink2Description=Datasheet, ComponentLink2URL=http://www.analog.com/static/imported-files/data_sheets/ADuM1200_1201.pdf, ComponentLink3Description="Package Specification", ComponentLink3URL=http://www.analog.com/static/imported-files/packages/PKG_PDF/SOIC_Narrow%20(R)/R_8.pdf, ComponentLink4Description="URL Link1", ComponentLink4URL="Product URL:http://www.analog.com/en/interface-isolation/digital-isolators/adum1201/products/product.html", ComponentLink5Description="URL Link2", ComponentLink5URL="Reference Circuit:http://www.analog.com/en/interface-isolation/digital-isolators/adum1201/products/product.html#product-recommendations", DatasheetVersion="Rev. I", Max Data Rate=10Mbps, Mounting Technology="Surface Mount", PackageDescription="8-Pin Standard Small Outline Package, Body 4.9 x 3.9 mm, Pitch 1.27 mm", PackageReference=R-8, PackageVersion="060506-A, 06/2006", PartNumber=ADUM1201BRZ-RL7
U4: library part CMP-12105-000007-1, "IC MCU 32BIT 512KB FLASH 64LQFP", Ambient Temperature Range High=+85°C, Ambient Temperature Range Low=-40°C, Frequency=180MHz, Manufacturer=ST, Max Junction Temp=+105°C, Max Supply Voltage=3.6V, Min Supply Voltage=1.7V, Package=LQFP64-5W, Temperature="-40°C to +105°C", Automotive=No, Category=IC, ComponentLink2Description=Datasheet, ComponentLink2URL=https://www.st.com/en/microcontrollers-microprocessors/stm32f446re.html, Core Architecture="ARM Cortex-M4", Data Bus Width=32bits, Device Class L1="Integrated Circuits (ICs)", Device Class L2="Embedded Processors and Controllers", Device Class L3=Microcontrollers, Digikey Description="IC MCU 32BIT 512KB FLASH 64LQFP", Height=1.6mm, Interface=I2C,SPI,UART,USART,CAN,USB,LIN,IrDA,I2S,Other, Ipc Land Pattern Name=QFP50P1200X1200X160-64, Lead Free=Yes, Manufacturer Part Number=STM32F446RET6, Memory Size=512KBytes, Memory Type=FLASH, Mouser Description="ARM Microcontrollers - MCU High-performance and DSP with FP, ARM Cortex-M4 MCU with 512 Kbytes Flash, 180 MHz CPU, Art Accelerator, SDRAM", Number Of A/D Converters=3, Number Of Adc Channels=16, Number Of Cores=1, Number Of I2C Channels=4, Number Of I/Os=50, Number Of Pwm Channels=32, Number Of Spi Channels=4, Number Of Timers/Counters=14, Number Of Uart Channels=6, Number Of Usb Channels=2, Octopart=https://octopart.com/stm32f446ret6-stmicroelectronics-52642920, Ram Size=128KBytes, RoHS=TRUE, Standoff Height=0.05mm, Temperature Range High=+105°C, Temperature Range Low=-40°C
Y1: library part CMP-2000-05033-2, "Crystal 8MHz ±20ppm 18pF SMD-2 5mm x 3.2mm", Case/Package=CSMD, ESR (Equivalent Series Resistance)=140R, Frequency=8MHz, Frequency Stability=30ppm, Frequency Tolerance=20ppm, Load Capacitance=18pF, Max Operating Temperature=85°C, Min Operating Temperature=-40°C, Package Quantity=1000, Resistor Type=Ceramic, Series Resistance=500R, Depth=3.2mm, Height=0.051inch, Lead Free="Lead Free", Length=5mm, Mount="Surface Mount", Number of Pins=2, Packaging="Tape and Reel", Radiation Hardening=No, RoHS Compliant=Yes, Termination=SMD/SMT, Tolerance=20ppm, Width=3.2mm

## Via types
v1: diameter 50, hole 28, Top Layer to Bottom Layer, 33 vias

## Nets (pads, with @x,y where several pads share a name; then routed paths per layer and width w, separated by ;. In a path a pad name is that pad's centre, name@x,y a point inside that pad or via, vN(x,y) a via of type N, cw(c..) or ccw(c..) an arc to the next point about the centre after c; other vN are vias at no path point)
CAN-3V3: C5.1 C6.1 J3.4 J4.4 R9.2 R10.2 U3.8 | length 3766.4
  Top Layer w10: C6.1 2388,1054.24 2390.62,1056.87 C5.1 2437,1269 2601,1433 2901,1433 2933,1401 2933,992.85 2965,960.85 2998.7,960.85 J4.4 3070.85,1209 3079.28,1217.43 J3.4 ; v1(2385,2288) 2382.52,2285.52 U3.8 2382,2248 2382,2285.52 2382,2767.76 2421,2806.76 R9.2 2498,2806.76 2498.76,2806 2550,2806
  Bottom Layer w10: v1(2385,2288) 2385,2088.28 J3.4
CAN_RX: U3.2 U4.33 | length 1067.7
  Top Layer w10: U3.2 2149,2198 2133,2182 2133,2015.19 2347,1801.19 2347,1454.36 2244,1351.36 U4.33
CAN_TX: U3.3 U4.34 | length 1165.9
  Top Layer w10: U3.3 2157,2148 2149,2140 2149,2084.75 2363,1870.75 2363,1422 2262,1321 2189,1321 2174,1336 2174,1371.05 U4.34
ENC1_A: R1.2 R5.1 U4.22 | length 1861.9
  Top Layer w10: R1.2 R5.1 v1(847,798) ; U4.22 1933.79,1224.21 1950,1208 1950,1144 v1(2025.63,1068.37)
  Bottom Layer w10: v1(847,798) 1755.26,798 v1(2025.63,1068.37)
ENC1_B: R2.2 R6.1 U4.23 | length 2065.3
  Top Layer w10: v1(500,686) R6.1 571.01,595 574.65,598.64 R2.2 ; U4.23 1953.47,1238 2017,1174.47 v1(2017,1148.95)
  Bottom Layer w10: v1(500,686) 670,856 1724.05,856 v1(2017,1148.95)
ENC2_A: R3.2 R7.1 U4.58 | length 2724.9
  Top Layer w10: R3.2 840,1115.64 844,1111.64 R7.1 903,1902 1027.29,2026.29 1027.29,2240 1045,2257.71 1589.29,2257.71 1627,2220 1627,2152 1648,2131 1938,2131 1953.47,2115.53 U4.58
ENC2_B: R4.2 R8.1 U4.59 | length 3031.5
  Top Layer w10: R8.1 526,1110.64 529,1113.64 R4.2 702.36,1113.64 729,1087 949,1087 984,1122 984,1959 1043.29,2018.29 1043.29,2217.28 1067.72,2241.71 1509,2241.71 1526.71,2224 1526.71,2168 1584.71,2110 1919,2110 1933.79,2095.21 U4.59
GND: C1.1 C2.1 C3.2 C4.2 C5.2 C6.2 C7.2 C8.2 C9.1 C10.2 ENC1.4 ENC2.4 IMU.02 IMU.07 J3.1 J4.1 J6.06 J6.07 J7.04 MTR_ENC_1.3 MTR_ENC_2.3 PWR_IN.2 R5.2 R6.2 R7.2 R8.2 R12.2 R17.2 R18.2 R19.2 R20.2 R22.2 RST_BTN.1 STLink.5 U1.1 U2.2 U3.4 U3.5 U4.18 | length 17543.6
  Top Layer w10: STLink.5 113,1798 113,1117 IMU.02 ; ENC2.4 903,979.03 ; R5.2 847,402.57 ENC1.4 692.43,248 568.43,248 481,335.43 481,463 500,482 R6.2 188.28,541.72 IMU.07 197,617 197,1033 IMU.02 ; J6.07 1085,2140 C7.2 ; C1.1 1357,700.58 ; PWR_IN.2 1367,361.43 1367,690.58 1357,700.58 ; U4.18 1855.05,1061.05 1813,1019 C9.1 1679,1019 1675,1023 C10.2 1525,1023 1477,1071 C8.2 1453.5,1329.5 ; R22.2 1766.64,2045.64 C7.2 ; U3.4 2303.12,2098 ; C4.2 2261.76,1006.76 ; U3.5 2303.12,2098 ; U2.2 2667.36,2193 2706.36,2232 ; J3.1 2784,1222.43 2775.57,1214 J4.1 2617.38,1033 2594,1009.62 C5.2 ; MTR_ENC_1.3 2848.74,331 2773,331 2731,373 R18.2 ; R17.2 3127,525 3104,548 2946,548 2944,546 2741,546 2731,536 R18.2 ; IMU.02 300,1075 317.64,1057.36 R8.2 538.64,1057.36 567,1029 567,888 594,861 853,861 903,911 903,979.03 ; 903,979.03 R7.2 1077,1058.36 1127.13,1108.49 C3.2 1127.13,1188 1092,1223.13 1057.42,1223.13 RST_BTN.1 1057.42,1325 1061.92,1329.5 1453.5,1329.5 ; 1357,700.58 1451,700.58 1452.98,698.6 U1.1 1663,698.6 1665.02,696.58 C2.1 1749,563.36 1781,531.36 R20.2 2031,531.36 2115,447.36 2115,330.74 MTR_ENC_2.3 2261.74,184 2358.26,184 2440,265.74 R19.2 2467,522.72 ; 1453.5,1329.5 1415,1368 1415,1720 1447,1752 C7.2 ; 2261.76,1006.76 2285.51,1006.76 2285.76,1007 C6.2 2388,1007 2390.62,1009.62 C5.2 ; 2261.76,1006.76 2279,1024 2279,1253 2706.36,1680.36 2706.36,2232 ; 2303.12,2098 2265.12,2136 2265.12,2218.88 2261,2223 2157,2223 2149,2231 2149,2737 2264,2852 2662.36,2852 2706.36,2808 R12.2 2706.36,2232 ; C5.2 2437,844 2467,814 2467,522.72 ; 2467,522.72 2582,522.72 2587.36,517.36 R18.2
  Bottom Layer w10: J7.04 985,2740 J6.06 J6.07 ; ENC1.4 1357.43,371 PWR_IN.2
I2C1_SCL: IMU.03 U4.61 | length 2462.9
  Top Layer w10: U4.61 1894.42,1684.58 1941,1638 v1(1941,1540)
  Bottom Layer w10: IMU.03 1736,975 1777,1016 1777,1422.58 1894.42,1540 v1(1941,1540)
I2C1_SDA: IMU.04 U4.62 | length 2409.3
  Top Layer w10: U4.62 1874.73,1648.27 v1(1905,1618)
  Bottom Layer w10: IMU.04 113,917 113,997 149,1033 1271,1033 1539,1301 1539,1467 1557,1485 1778,1485 1905,1612 v1(1905,1618)
IMU_INT: IMU.08 U4.26 | length 2470.9
  Top Layer w10: U4.26 2012.53,1214 2125,1101.53 v1(2125,1061)
  Bottom Layer w10: IMU.08 1539,475 v1(2125,1061)
M1CS: C9.2 R23.1 U4.8 | length 2524.9
  Top Layer w10: R23.1 1406,1992 v1(1425,2011) ; v1(1596,1412) 1596,1434.31 1670.54,1508.84 U4.8 ; C9.2 v1(1736,1272)
  Bottom Layer w10: v1(1425,2011) 1998,2011 2289,1720 2289,1656 2256,1623 1967.42,1623 1901,1556.58 1881.58,1556.58 1736,1411 v1(1736,1272) v1(1596,1412)
M1DIR: J9.01 U4.10 | length 3184.3
  Top Layer w10: U4.10 1873.53,1469.47 v1(1878,1465) ; v1(2021,3342) 2071,3292 2071,1933.48 2171.48,1833 2171.48,1507.95 v1(2128.53,1465)
  Bottom Layer w10: J9.01 1227,3342 v1(2021,3342) ; v1(1878,1465) v1(2128.53,1465)
M1FLT: J9.02 U4.56 | length 1867.8
  Top Layer w10: J9.02 1992.84,2592.16 U4.56
M1PWM: J7.09 U4.41 | length 3379.8
  Top Layer w10: J7.09 1094,3469 2106.14,3469 2112,3463.14 2112,2006.78 2331,1787.78 2331,1587.84 2252,1508.84 U4.41
M1SLP: J9.06 U4.24 | length 2551.1
  Top Layer w10: U4.24 1973.16,1513.16 v1(2008,1548)
  Bottom Layer w10: J9.06 1685,2868 2305,2248 2305,1624 2288,1607 2067,1607 v1(2008,1548)
M2CS: C10.1 R24.1 U4.9 | length 1697.3
  Top Layer w10: R24.1 1668,1994 1760,2086 1877,2086 1897,2066 1897,2018 1839,2018 1797,1976 1797,1497.16 1789,1489.16 U4.9 1685.69,1489.16 1666,1469.47 1666,1394 1619,1347 C10.1
M2DIR: J7.10 U4.11 | length 4077.2
  Top Layer w10: v1(543,1609) 543,3222 567,3246 567,3384 599,3416 838,3416 870,3384 870,3288 900,3258 983,3258 J7.10 ; U4.11 1799,1449.79 1820.92,1427.87 1900.87,1427.87 1925,1452 1925,1484 1849,1560 v1(1849,1609)
  Bottom Layer w10: v1(543,1609) v1(1849,1609)
M2FLT: J7.06 U4.57 | length 2301.6
  Top Layer w10: J7.06 1643.29,2281.71 1643.29,2168 1657.29,2154 1945,2154 1973.16,2125.84 U4.57
M2PWM: J7.08 U4.42 | length 3305.3
  Top Layer w10: v1(2076,3401) 2092,3385 2092,1988.63 2289,1791.63 2289,1576 2241.53,1528.53 U4.42
  Bottom Layer w10: J7.08 926,3401 v1(2076,3401)
M2SLP: J9.04 U4.25 | length 2366.3
  Top Layer w10: J9.04 2012,2773 2012,1908 2148,1772 2148,1632 2112.53,1596.53 2112.53,1535 1992.84,1415.31 U4.25
MTR_ENC_1_A: R13.2 R17.1 U4.21 | length 1822.6
  Top Layer w10: v1(1914,1172) 1914.1,1172.1 U4.21 ; v1(3045,900) R13.2 3102,576.64 3103.64,578.28 R17.1
  Bottom Layer w10: v1(1914,1172) 1958.95,1216.95 2170.05,1216.95 2487,900 v1(3045,900)
MTR_ENC_1_B: R14.2 R18.1 U4.55 | length 1828.1
  Top Layer w10: U4.55 2012.53,1619.59 v1(2076.53,1555.59) ; v1(2825,1123) 2825,808 2731,714 R18.1 2786,570.64 2788,572.64 R14.2
  Bottom Layer w10: v1(2076.53,1555.59) 2392.41,1555.59 v1(2825,1123)
MTR_ENC_2_A: R15.2 R19.1 U4.14 | length 1553.5
  Top Layer w10: U4.14 v1(1862,1390.73) ; v1(2302,948) 2440,810 R19.1 2377,576 2374,573 R15.2
  Bottom Layer w10: v1(1862,1390.73) 1862,1144 1870,1136 1942,1136 1950,1144 1950,1160 1990.95,1200.95 2149.05,1200.95 2302,1048 v1(2302,948)
MTR_ENC_2_B: R16.2 R20.1 U4.15 | length 1370.3
  Top Layer w10: U4.15 1795,1371.05 v1(1820,1346.05) ; R20.1 2059,584.64 2061.64,582 R16.2 v1(2116,853)
  Bottom Layer w10: v1(1820,1346.05) 1820,1144 1844,1120 1958,1120 1966,1128 1966,1149 2001.95,1184.95 2101.05,1184.95 2168,1118 2168,905 v1(2116,853)
NetD1_1: D1.1 U2.4 U3.7 | length 973.2
  Top Layer w10: v1(2321,2284) 2321,2216 2339,2198 U3.7 2432,2198 2450,2216 D1.1 ; v1(2527,2100) 2534,2093 U2.4
  Bottom Layer w10: v1(2321,2284) 2365,2328 2429,2328 2527,2230 v1(2527,2100)
NetD1_2: D1.2 R9.1 | length 209.7
  Top Layer w10: R9.1 2448,2673 2450,2671 D1.2
NetD2_1: D2.1 U2.1 U3.6 | length 538.1
  Top Layer w10: U3.6 2486,2148 2581,2243 ; D2.1 2548,2276 2581,2243 ; U2.1 2581,2243
NetD2_2: D2.2 R10.1 | length 205
  Top Layer w10: D2.2 2548,2673 2550,2675 2550,2761.71 ; R10.1 2583,2783.76
NetENC1_2: ENC1.2 R2.1 | length 176.3
  Top Layer w10: R2.1 614,459.57 618.57,455 ENC1.2
NetENC1_3: ENC1.3 R1.1 | length 168.9
  Top Layer w10: ENC1.3 717,448 727,458 R1.1
NetENC2_2: ENC2.2 R4.1 | length 174.7
  Top Layer w10: R4.1 593,933.46 ENC2.2
NetENC2_3: ENC2.3 R3.1 | length 186.2
  Top Layer w10: ENC2.3 782,956.46 R3.1
NetJ3_2: J3.2 J4.2 P1.2 U2.6 | length 1105.7
  Top Layer w10: J4.2 2874,1213 2882.43,1221.43 J3.2
  Bottom Layer w10: J3.2 2942.43,1334 3084,1334 3118,1368 3118,1730 P1.2
NetJ3_3: J3.3 J4.3 R11.1 U2.7 | length 1386.1
  Top Layer w10: U2.7 2997.92,2193 3022.92,2168 R11.1 3022.92,1971.92 2980.85,1929.85 J3.3 2980.85,1217.43 2972.42,1209 J4.3
NetJ8_01: J8.01 R23.2 | length 173.4
  Top Layer w10: R23.2 1383,2112 1385,2114 J8.01
NetJ8_02: J8.02 R24.2 | length 178
  Top Layer w10: R24.2 1485,2047.43 J8.02
NetMTR_ENC_1_6: MTR_ENC_1.6 R14.1 | length 199.8
  Top Layer w10: R14.1 2843,494.22 MTR_ENC_1.6
NetMTR_ENC_1_8: MTR_ENC_1.8 R13.1 | length 152.7
  Top Layer w10: R13.1 3045,446.22 3045.22,446 MTR_ENC_1.8
NetMTR_ENC_2_6: MTR_ENC_2.6 R16.1 | length 207.6
  Top Layer w10: R16.1 2116,487.22 MTR_ENC_2.6
NetMTR_ENC_2_8: MTR_ENC_2.8 R15.1 | length 150.1
  Top Layer w10: R15.1 2312,444.22 2312.22,444 MTR_ENC_2.8
NetP1_1: P1.1 R11.2 | length 312.4
  Top Layer w10: R11.2 3143,1961 3144,1960 P1.1
NetR12_1: R12.1 U2.8 | length 276
  Top Layer w10: R12.1 2759.64,2286.44 U2.8
NetR22_1: R22.1 U4.60 | length 285.2
  Top Layer w10: R22.1 1870,1804.1 1914.1,1760 U4.60
NRST: C3.1 R21.1 RST_BTN.3 STLink.4 U4.7 | length 2675.7
  Top Layer w10: C3.1 1198,1138 1199,1137 R21.1 1238.72,1192 1234.58,1196.13 RST_BTN.3 1234.58,1296 1317,1296 1341,1272 v1(1341,1223) ; v1(1622.53,1528.53) U4.7
  Bottom Layer w10: STLink.4 108,1693 108,1541 147,1502 1150,1502 ; v1(1341,1223) 1341,1311 1150,1502 ; v1(1622.53,1528.53) 1596,1502 1150,1502
OSC1: C7.1 U4.5 Y1.1 | length 420.4
  Top Layer w10: C7.1 1473,1691.97 1486.95,1678.02 Y1.1@1486.95,1607.71 ; Y1.1 Y1.1@1486.95,1607.71 ; U4.5 1724.52,1567.9 1681.42,1611 1569,1611 1565.71,1607.71 Y1.1@1486.95,1607.71
OSC2: C8.1 U4.6 Y1.2 | length 469.9
  Top Layer w10: C8.1 1477,1402 1474,1405 Y1.2 1492,1446.29 1585,1539.29 1585,1560 1620,1595 1670,1595 1689,1576 1689,1563 1703.79,1548.21 U4.6
SWCLK: STLink.3 U4.49 | length 2015.9
  Top Layer w10: v1(2059,1668) 2110.64,1668 2130.64,1688 U4.49
  Bottom Layer w10: STLink.3 1877,1652 1893,1668 v1(2059,1668)
SWDIO: STLink.2 U4.46 | length 2410.3
  Top Layer w10: U4.46 2235.54,1607.27 2252.27,1624 v1(2252.27,1704)
  Bottom Layer w10: STLink.2 124,1595 124,1674 154,1704 v1(2252.27,1704)
VCC-3V3: C2.2 C4.1 IMU.01 R21.2 STLink.1 U1.2 U2.3 U3.1 U4.19 | length 5942.1
  Top Layer w10: IMU.01 155,1307 167,1319 STLink.1 ; v1(1297,1258) 1292,1253 R21.2 1292,902.4 1421,773.4 U1.2 1662,773.4 1665.98,769.42 C2.2 1813,769.42 1874.73,831.15 1874.73,1088.27 ; U4.19 1874.73,1088.27 ; U3.1 2268,2248 2284,2232 2284,2216 2325,2175 2452,2175 2507,2230 2507,2515 2517,2525 2612,2525 2669,2468 2669,2221 2588,2221 2551,2184 2551,2168 2576,2143 ; U2.3 2576,2143 ; 1874.73,1088.27 1938.82,1024.18 2161,1024.18 2190.82,1054 C4.1 2225,1228 2452,1455 2452,2088 2507,2143 2576,2143
  Bottom Layer w10: STLink.1 361,1258 v1(1297,1258)
VCC-5V: C1.2 ENC1.1 ENC2.1 MTR_ENC_1.2 MTR_ENC_2.2 PWR_IN.1 U1.3 | length 3827.7
  Top Layer w10: ENC1.1 560,410.85 560,536 597,573 641,573 641,787.03 ENC2.1 ; PWR_IN.1 1312,586 1283,615 1283,763.42 1293,773.42 C1.2 1396,773.42 1433.42,736 U1.3
  Bottom Layer w10: ENC1.1 573.15,318 PWR_IN.1 1354,276 1982.26,276 MTR_ENC_2.2 2210.26,504 2675.74,504 MTR_ENC_1.2
pads on no net: IMU.05 IMU.06 J6.01 J6.02 J6.03 J6.04 J6.05 J6.08 J7.01 J7.02 J7.03 J7.05 J7.07 J8.03 J8.04 J8.05 J8.06 J9.03 J9.05 J9.07 J9.08 MTR_ENC_1.1 MTR_ENC_1.4 MTR_ENC_1.5 MTR_ENC_1.7 MTR_ENC_1.9 MTR_ENC_1.10 MTR_ENC_2.1 MTR_ENC_2.4 MTR_ENC_2.5 MTR_ENC_2.7 MTR_ENC_2.9 MTR_ENC_2.10 RST_BTN.2 RST_BTN.4 U2.5 U4.1 U4.2 U4.3 U4.4 U4.12 U4.13 U4.16 U4.17 U4.20 U4.27 U4.28 U4.29 U4.30 U4.31 U4.32 U4.35 U4.36 U4.37 U4.38 U4.39 U4.40 U4.43 U4.44 U4.45 U4.47 U4.48 U4.50 U4.51 U4.52 U4.53 U4.54 U4.63 U4.64